# Altium PCB Underwater_ROV_Aux.PcbDoc (part 1 of 2)
Units mm, origin at the board's own origin, x right, y up, seen from the top; angles counter-clockwise.
Board outline 100 x 100 mm, 2 copper layers (Top Layer, Bottom Layer); 61 components, 140 nets, 560 pads, 86 vias.
Unrouted connection lines stored in the file: 2.
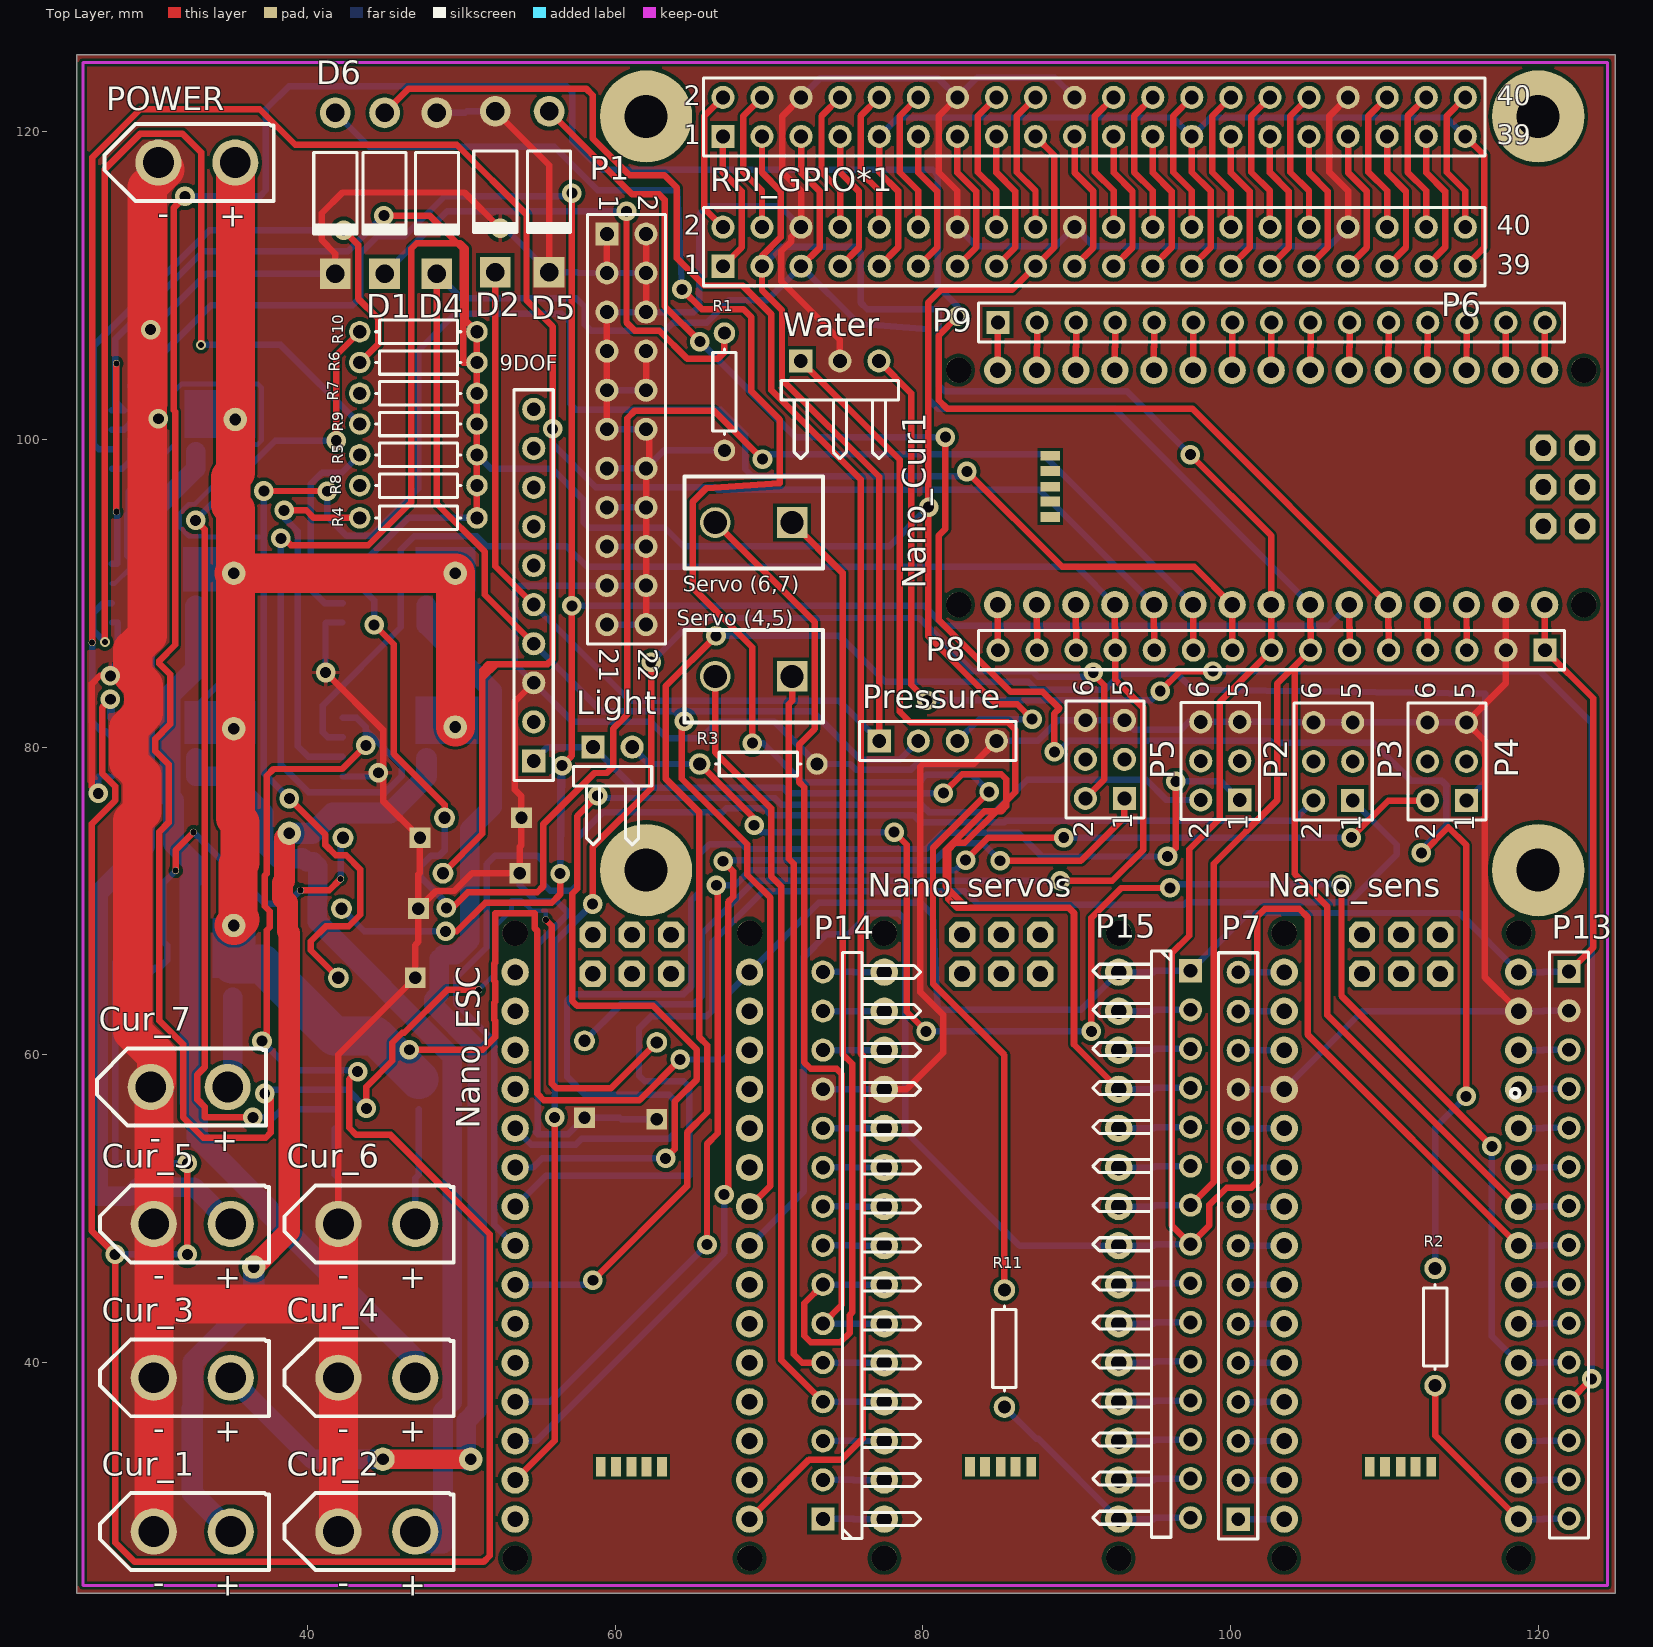
[diagram p0: Top Layer view]
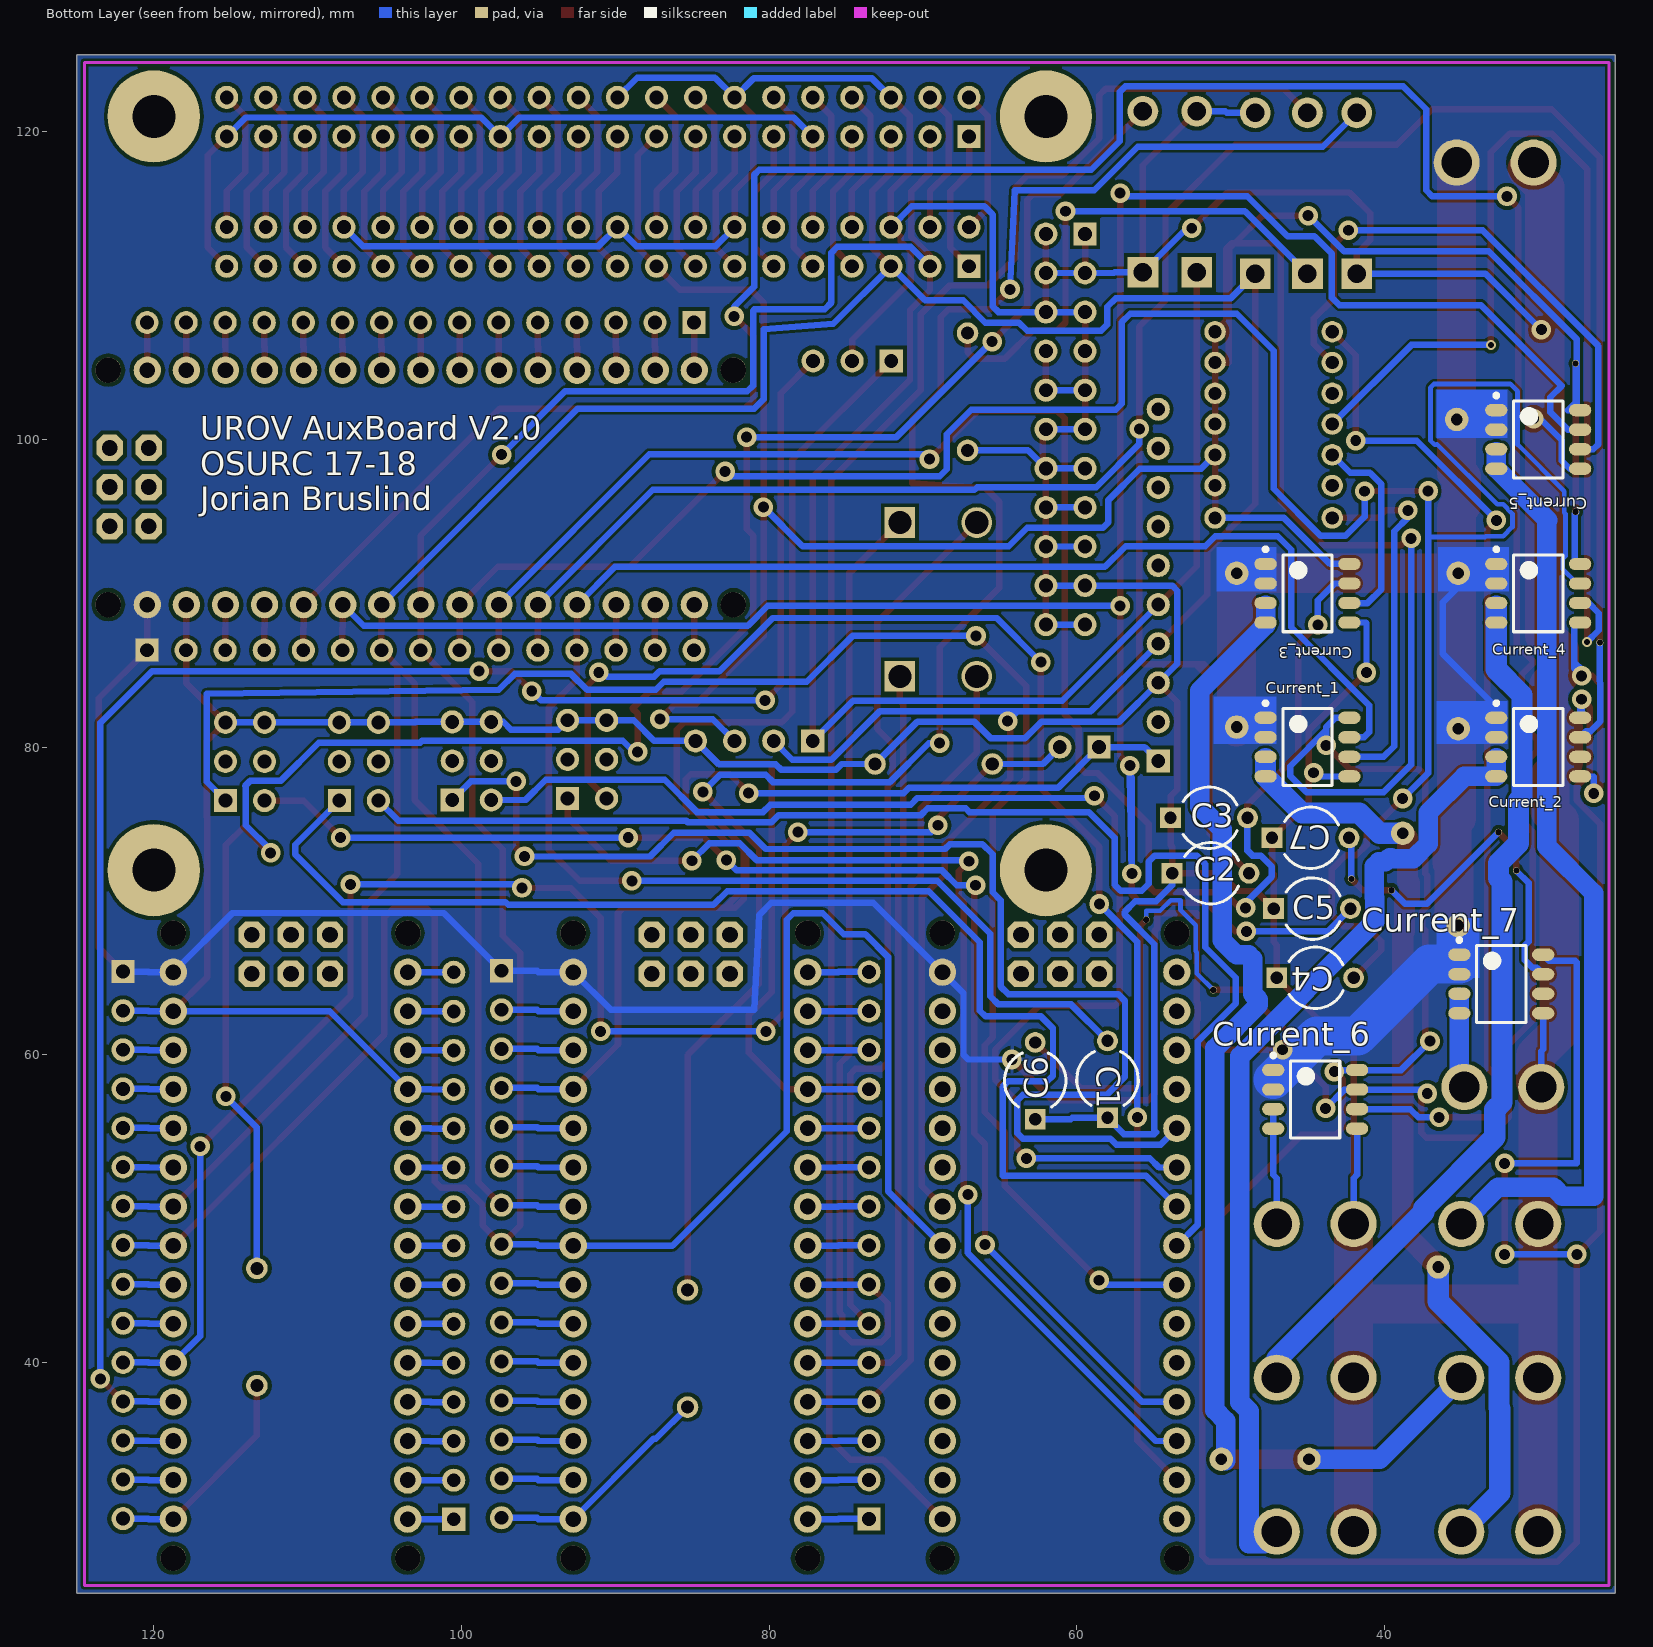
[diagram p1: Bottom Layer view, seen from below]
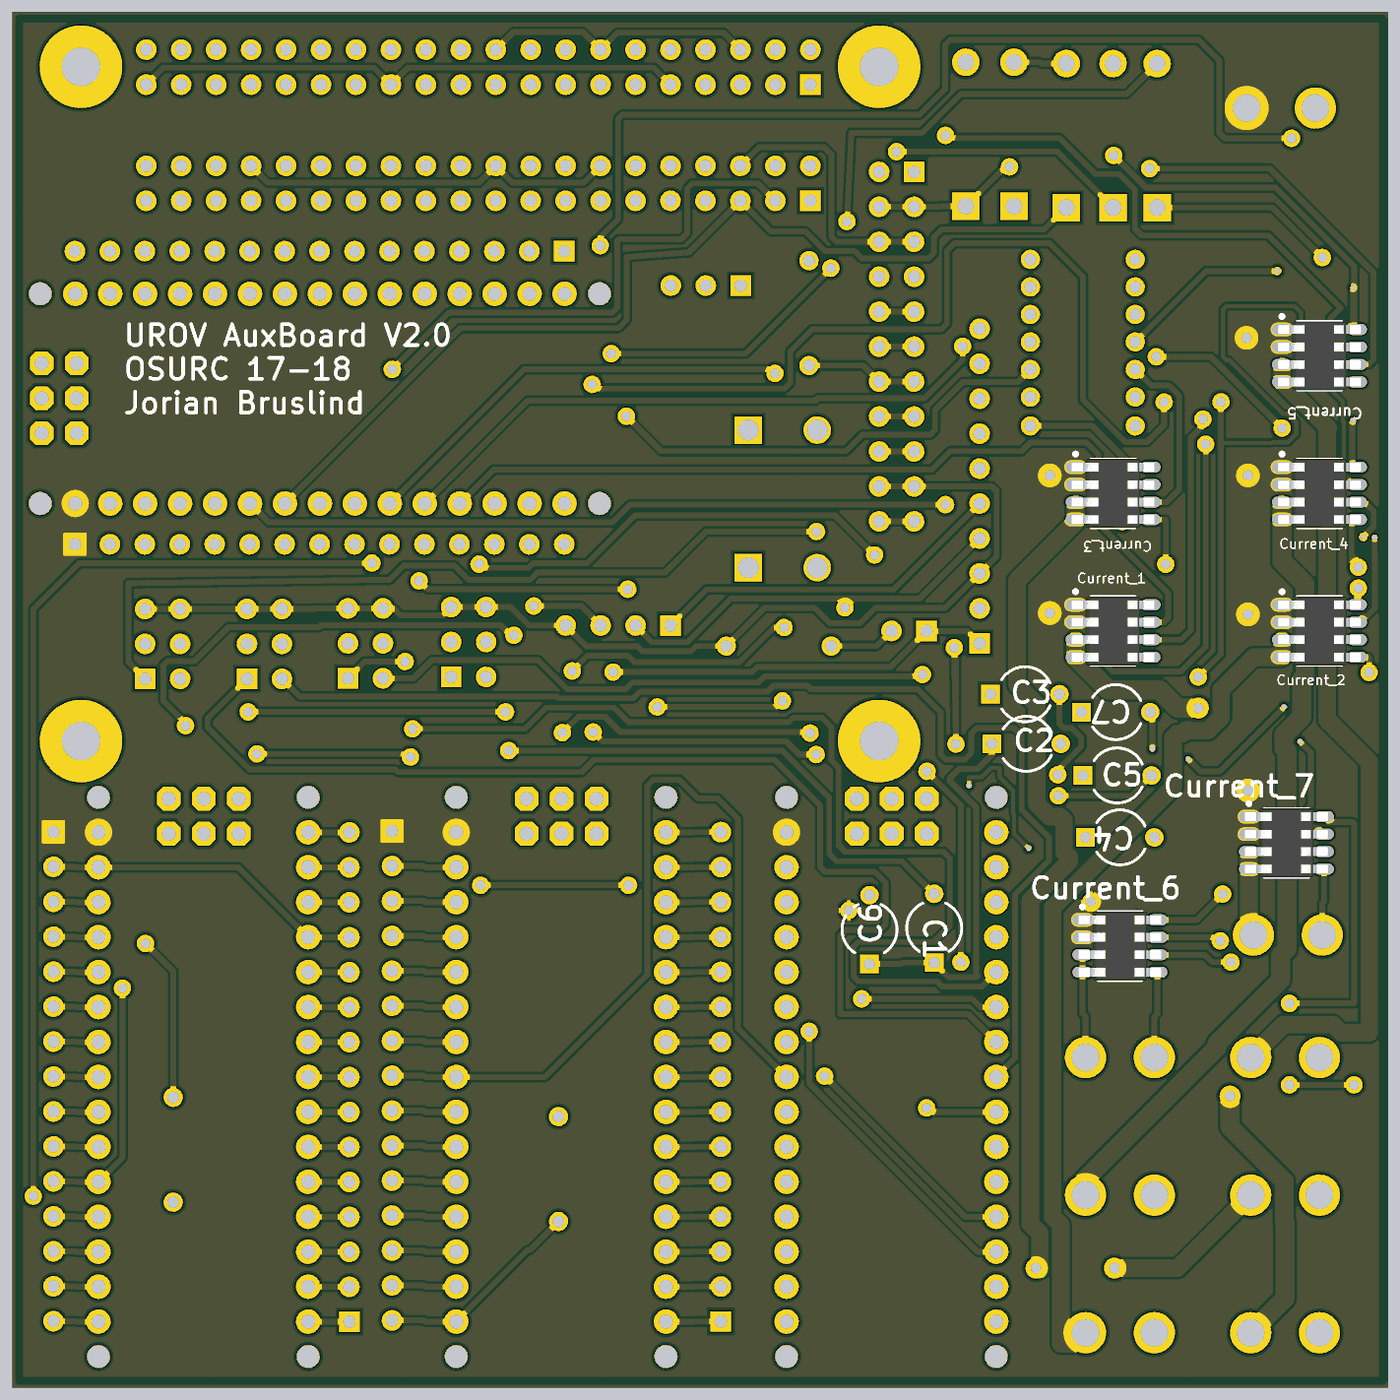
[diagram p3: 3D render of the assembled board from below, using the file's embedded part models]

## Layer stack, top to bottom
Top Solder: solder mask 0.0102, Solder Resist, Dk 3.5
Top Layer: signal copper 0.0356
Dielectric 1: dielectric 0.32, FR-4, Dk 4.8
Bottom Layer: signal copper 0.0356
Bottom Solder: solder mask 0.0102, Solder Resist, Dk 3.5

## Board outline
25,25 25,125 125,125 125,25

## Design rules (kind name [scope] priority, off if disabled: settings)
Clearance [All] p1: gap=0.178 ignorepadtopadclearanceinfootprint=FALSE except(0: Arc-Hole Track-Hole SMDPad-Hole THPad-Hole Via-Hole Fill-Hole Poly-Hole Region-Hole Text-Hole; 0.254: THPad-THPad THPad-Via THPad-Fill THPad-Poly THPad-Region THPad-Text Via-Via Via-Fill Via-Poly Via-Region Via-Text Fill-Fill Fill-Poly Fill-Region Fill-Text Poly-Poly Poly-Region Poly-Text Region-Region Region-Text Text-Text)
PolygonConnect PolygonConnect_13 [All vs IsNamedPolygon('Bot Layer - 12V')] p1: thpad.connectstyle=Direct thpad.reliefconductorwidth=0.254 thpad.reliefentries=4 thpad.polygonreliefangle="90 Angle" thpad.airgapwidth=0.254 smdpad.connectstyle=Direct smdpad.reliefconductorwidth=0.254 smdpad.reliefentries=4 smdpad.polygonreliefangle="90 Angle" smdpad.airgapwidth=0.254 via.connectstyle=Relief via.reliefconductorwidth=0.254 via.reliefentries=4 via.polygonreliefangle="90 Angle" via.airgapwidth=0.254
PolygonConnect PolygonConnect_12 [All vs IsNamedPolygon('Top Layer GND')] p2: thpad.connectstyle=Direct thpad.reliefconductorwidth=0.254 thpad.reliefentries=4 thpad.polygonreliefangle="90 Angle" thpad.airgapwidth=0.254 smdpad.connectstyle=Direct smdpad.reliefconductorwidth=0.254 smdpad.reliefentries=4 smdpad.polygonreliefangle="90 Angle" smdpad.airgapwidth=0.254 via.connectstyle=Relief via.reliefconductorwidth=0.254 via.reliefentries=4 via.polygonreliefangle="90 Angle" via.airgapwidth=0.254
PolygonConnect PolygonConnect_11 [All vs IsNamedPolygon('Top Layer-GND')] p3: thpad.connectstyle=Direct thpad.reliefconductorwidth=0.254 thpad.reliefentries=4 thpad.polygonreliefangle="90 Angle" thpad.airgapwidth=0.254 smdpad.connectstyle=Direct smdpad.reliefconductorwidth=0.254 smdpad.reliefentries=4 smdpad.polygonreliefangle="90 Angle" smdpad.airgapwidth=0.254 via.connectstyle=Relief via.reliefconductorwidth=0.254 via.reliefentries=4 via.polygonreliefangle="90 Angle" via.airgapwidth=0.254
PolygonConnect PolygonConnect_10 [All vs IsNamedPolygon('Top Layer-GND')] p4: thpad.connectstyle=Direct thpad.reliefconductorwidth=0.254 thpad.reliefentries=4 thpad.polygonreliefangle="90 Angle" thpad.airgapwidth=0.254 smdpad.connectstyle=Direct smdpad.reliefconductorwidth=0.254 smdpad.reliefentries=4 smdpad.polygonreliefangle="90 Angle" smdpad.airgapwidth=0.254 via.connectstyle=Relief via.reliefconductorwidth=0.254 via.reliefentries=4 via.polygonreliefangle="90 Angle" via.airgapwidth=0.254
PolygonConnect PolygonConnect_9 [All vs IsNamedPolygon('Bot Layer - 12V')] p5: thpad.connectstyle=Direct thpad.reliefconductorwidth=0.254 thpad.reliefentries=4 thpad.polygonreliefangle="90 Angle" thpad.airgapwidth=0.254 smdpad.connectstyle=Direct smdpad.reliefconductorwidth=0.254 smdpad.reliefentries=4 smdpad.polygonreliefangle="90 Angle" smdpad.airgapwidth=0.254 via.connectstyle=Relief via.reliefconductorwidth=0.254 via.reliefentries=4 via.polygonreliefangle="90 Angle" via.airgapwidth=0.254
PolygonConnect PolygonConnect_8 [All vs IsNamedPolygon('Bot Layer - 12V')] p6: thpad.connectstyle=Direct thpad.reliefconductorwidth=0.254 thpad.reliefentries=4 thpad.polygonreliefangle="90 Angle" thpad.airgapwidth=0.254 smdpad.connectstyle=Direct smdpad.reliefconductorwidth=0.254 smdpad.reliefentries=4 smdpad.polygonreliefangle="90 Angle" smdpad.airgapwidth=0.254 via.connectstyle=Relief via.reliefconductorwidth=0.254 via.reliefentries=4 via.polygonreliefangle="90 Angle" via.airgapwidth=0.254
PolygonConnect PolygonConnect_7 [All vs IsNamedPolygon('Top Layer-GND')] p7: thpad.connectstyle=Direct thpad.reliefconductorwidth=0.254 thpad.reliefentries=4 thpad.polygonreliefangle="90 Angle" thpad.airgapwidth=0.254 smdpad.connectstyle=Direct smdpad.reliefconductorwidth=0.254 smdpad.reliefentries=4 smdpad.polygonreliefangle="90 Angle" smdpad.airgapwidth=0.254 via.connectstyle=Relief via.reliefconductorwidth=0.254 via.reliefentries=4 via.polygonreliefangle="90 Angle" via.airgapwidth=0.254
PolygonConnect PolygonConnect_6 [All vs IsNamedPolygon('Bot layer - 12V')] p8: thpad.connectstyle=Direct thpad.reliefconductorwidth=0.254 thpad.reliefentries=4 thpad.polygonreliefangle="90 Angle" thpad.airgapwidth=0.254 smdpad.connectstyle=Direct smdpad.reliefconductorwidth=0.254 smdpad.reliefentries=4 smdpad.polygonreliefangle="90 Angle" smdpad.airgapwidth=0.254 via.connectstyle=Relief via.reliefconductorwidth=0.254 via.reliefentries=4 via.polygonreliefangle="90 Angle" via.airgapwidth=0.254
PolygonConnect PolygonConnect_5 [All vs IsNamedPolygon('Top Layer-GND')] p9: thpad.connectstyle=Direct thpad.reliefconductorwidth=0.254 thpad.reliefentries=4 thpad.polygonreliefangle="90 Angle" thpad.airgapwidth=0.254 smdpad.connectstyle=Direct smdpad.reliefconductorwidth=0.254 smdpad.reliefentries=4 smdpad.polygonreliefangle="90 Angle" smdpad.airgapwidth=0.254 via.connectstyle=Relief via.reliefconductorwidth=0.254 via.reliefentries=4 via.polygonreliefangle="90 Angle" via.airgapwidth=0.254
PolygonConnect PolygonConnect_4 [All vs IsNamedPolygon('Bot Layer - 12V')] p10: thpad.connectstyle=Direct thpad.reliefconductorwidth=0.254 thpad.reliefentries=4 thpad.polygonreliefangle="90 Angle" thpad.airgapwidth=0.254 smdpad.connectstyle=Direct smdpad.reliefconductorwidth=0.254 smdpad.reliefentries=4 smdpad.polygonreliefangle="90 Angle" smdpad.airgapwidth=0.254 via.connectstyle=Relief via.reliefconductorwidth=0.254 via.reliefentries=4 via.polygonreliefangle="90 Angle" via.airgapwidth=0.254
PolygonConnect PolygonConnect_3 [All vs IsNamedPolygon('Top Layer-GND')] p11: thpad.connectstyle=Direct thpad.reliefconductorwidth=0.254 thpad.reliefentries=4 thpad.polygonreliefangle="90 Angle" thpad.airgapwidth=0.254 smdpad.connectstyle=Direct smdpad.reliefconductorwidth=0.254 smdpad.reliefentries=4 smdpad.polygonreliefangle="90 Angle" smdpad.airgapwidth=0.254 via.connectstyle=Relief via.reliefconductorwidth=0.254 via.reliefentries=4 via.polygonreliefangle="90 Angle" via.airgapwidth=0.254
PolygonConnect PolygonConnect_2 [All vs IsNamedPolygon('Bot Layer - 12V')] p12: thpad.connectstyle=Direct thpad.reliefconductorwidth=0.254 thpad.reliefentries=4 thpad.polygonreliefangle="90 Angle" thpad.airgapwidth=0.254 smdpad.connectstyle=Direct smdpad.reliefconductorwidth=0.254 smdpad.reliefentries=4 smdpad.polygonreliefangle="90 Angle" smdpad.airgapwidth=0.254 via.connectstyle=Relief via.reliefconductorwidth=0.254 via.reliefentries=4 via.polygonreliefangle="90 Angle" via.airgapwidth=0.254
PolygonConnect PolygonConnect_1 [All vs IsNamedPolygon('Top Layer-GND')] p13: thpad.connectstyle=Direct thpad.reliefconductorwidth=0.254 thpad.reliefentries=4 thpad.polygonreliefangle="90 Angle" thpad.airgapwidth=0.254 smdpad.connectstyle=Direct smdpad.reliefconductorwidth=0.254 smdpad.reliefentries=4 smdpad.polygonreliefangle="90 Angle" smdpad.airgapwidth=0.254 via.connectstyle=Relief via.reliefconductorwidth=0.254 via.reliefentries=4 via.polygonreliefangle="90 Angle" via.airgapwidth=0.254
PolygonConnect [All] p14: connectstyle=Relief reliefconductorwidth=0.254 reliefentries=4 polygonreliefangle="90 Angle" airgapwidth=0.254
RoomDefinition Underwater_ROV_CurrentSense [InComponentClass('Underwater_ROV_CurrentSense')] p1: confinementstyle=ConfineIn formatcopy=TRUE lockcomponents=FALSE outline 25.015,24.996 125.1,24.996 125.1,128.5 25.015,128.5
RoomDefinition Underwater_ROV_Servos [InComponentClass('Underwater_ROV_Servos')] p2: confinementstyle=ConfineIn formatcopy=TRUE lockcomponents=FALSE outline 25.034,25.015 124.6,25.015 124.6,128.349 25.034,128.349
RoomDefinition Underwater_ROV_Sensors [InComponentClass('Underwater_ROV_Sensors')] p3: confinementstyle=ConfineIn formatcopy=TRUE lockcomponents=FALSE outline 24.994,24.981 124.6,24.981 124.6,129.344 24.994,129.344
RoomDefinition Underwater_ROV_RPI [InComponentClass('Underwater_ROV_RPI')] p4: confinementstyle=ConfineIn formatcopy=TRUE lockcomponents=FALSE outline 61,102 124.32,102 124.32,125.953 61,125.953
RoomDefinition Underwater_ROV_ESCS [InComponentClass('Underwater_ROV_ESCS')] p5: confinementstyle=ConfineIn formatcopy=TRUE lockcomponents=FALSE outline 24.994,24.981 124.6,24.981 124.6,125.4 24.994,125.4
RoutingLayers RoutingLayers_2 [All] p1: top layer_v5=TRUE bottom layer_v5=TRUE
RoutingLayers RoutingLayers_1 [InNet('12V')] p2: top layer_v5=FALSE bottom layer_v5=FALSE
RoutingLayers [InNet('GND')] p3: top layer_v5=FALSE bottom layer_v5=FALSE
RoutingVias [All] p1: holewidth=0.381 width=0.635 viastyle="Through Hole" minholewidth=0.33 minwidth=0.508 maxholewidth=0.711 maxwidth=1.27
SMDNeckDown [InNet('GND')] p1: percent=50.000
SolderMaskExpansion [All] p1: expansion=0.102
Width [All] p1: maxlimit=10 minlimit=0.152 preferedwidth=0.42 minimp=50.000000 maximp=50.000000 favimp=50.000000
29 further rules are at their usual default settings.

## Classes and differential pairs
component class Underwater_ROV_ESCS: D1 ESC(78) Nano_ESC P1 P2 P3 P4 P5 R1
component class Underwater_ROV_RPI: D2 D4 P6 POWER RPI_GPIO*1
component class Underwater_ROV_Sensors: 9DOF .1 C1 C2 C3 C4 C5 C6 C7 Cur_1 Cur_2 Cur_3 Cur_4 Cur_5 Cur_6 Cur_7 Current_1 Current_2 Current_3 Current_4 Current_5 Current_6 Current_7 D5 Light Nano_sens P7 P13 Pressure R2 R3 R4 R5 R6 R7 R8 R9 R10 Water
component class Underwater_ROV_Servos: D6 Nano_servos P14 P15 R11 "Servo (4,5)" "Servo (6,7)"
component class Underwater_ROV_CurrentSense: Nano_Cur1 P8 P9 P?

## Components (designator, comment, footprint, x,y, rotation, side; value= is the part's Value field where it differs from the comment)
9DOF "Header 10" HDR1X10 54.7,79.1 r90 top
C1 "Cap2" CAPR5-4X5#1 58,58.4 r90 bottom value=100pF
C2 "Cap2" CAPR5-4X5#1 51.3,71.8 r180 bottom value=100pF
C3 "Cap2" CAPR5-4X5#1 51.4,75.4 r180 bottom value=100pF
C4 "Cap2" CAPR5-4X5#2 44.5,65 r180 bottom value=100pF
C5 "Cap2" CAPR5-4X5#1 44.7,69.5 r180 bottom value=100pF
C6 "Cap2" CAPR5-4X5#1 62.7,58.3 r90 bottom value=100pF
C7 "Cap2" CAPR5-4X5#1 44.8,74.1 r180 bottom value=100pF
Cur_1 "XT30_2pin" XT30_2pin 35,29 r180 top
Cur_2 "XT30_2pin" XT30_2pin 47,29 r180 top
Cur_3 "XT30_2pin" XT30_2pin 35,39 r180 top
Cur_4 "XT30_2pin" XT30_2pin 47,39 r180 top
Cur_5 "XT30_2pin" XT30_2pin 35,49 r180 top
Cur_6 "XT30_2pin" XT30_2pin 47,49 r180 top
Cur_7 "XT30_2pin" XT30_2pin 34.8,57.9 r180 top
Current_1 "ACS711" SOIC127P600X175-8N 45,80 r180 bottom
Current_2 "ACS711" SOIC127P600X175-8N 30,80 r180 bottom
Current_3 "ACS711" SOIC127P600X175-8N 45,90 r180 bottom
Current_4 "ACS711" SOIC127P600X175-8N 30,90 r180 bottom
Current_5 "ACS711" SOIC127P600X175-8N 30,100 r180 bottom
Current_6 "ACS711" SOIC127P600X175-8N 44.5,57.1 r180 bottom
Current_7 "ACS711" SOIC127P600X175-8N 32.4,64.6 r180 bottom
D1 "Diode 1N4001" DO-41 45,116 r270 top
D2 "Diode 11DQ03" DO-204AL 52.2,116.1 r270 top
D4 "Diode 11DQ03" DO-204AL 48.4,116 r270 top
D5 "Diode 1N4001" DO-41 55.7,116.1 r270 top
D6 "Diode 1N4001" DO-41 41.8,116 r270 top
Light "Header 2H" HDR1X2H 58.56,80 r0 top
Nano_Cur1 "Device for representing an Arduino Nano board with a footprint in an EAGLE design. Created by Dave Young for Element14. More EAGLE documentation at: http://www.element14.com/community/community/knode/cadsoft_eagle" ARDUINO_NANO 81.05,87.99 r0 top
Nano_ESC "Device for representing an Arduino Nano board with a footprint in an EAGLE design. Created by Dave Young for Element14. More EAGLE documentation at: http://www.element14.com/community/community/knode/cadsoft_eagle" ARDUINO_NANO 70,26 r90 top
Nano_sens "Device for representing an Arduino Nano board with a footprint in an EAGLE design. Created by Dave Young for Element14. More EAGLE documentation at: http://www.element14.com/community/community/knode/cadsoft_eagle" ARDUINO_NANO 120,26 r90 top
Nano_servos "Device for representing an Arduino Nano board with a footprint in an EAGLE design. Created by Dave Young for Element14. More EAGLE documentation at: http://www.element14.com/community/community/knode/cadsoft_eagle" ARDUINO_NANO 94,26 r90 top
P1 "Header 11X2" HDR2X11 59.46,113.36 r270 top
P2 "Header 3X2" HDR2X3 100.6,76.56 r90 top
P3 "Header 3X2" HDR2X3 107.94,76.52 r90 top
P4 "Header 3X2" HDR2X3 115.34,76.52 r90 top
P5 "Header 3X2" HDR2X3 93.1,76.66 r90 top
P6 "Header 20X2" HDR2X20 67,111.26 r0 top
P7 "Header 15" HDR1X15 100.5,29.8 r90 top
P8 "Header 15" HDR1X15 120.44,86.3 r180 top
P9 "Header 15" HDR1X15 84.88,107.6 r0 top
P13 "Header 15" HDR1X15 122,65.4 r270 top
P14 "Header 15H" HDR1X15H 73.5,29.82 r90 top
P15 "Header 15H" HDR1X15H 97.4,65.46 r270 top
POWER "XT30_2pin" XT30_2pin 35.3,118 r180 top
Pressure "Header 4" HDR1X4 77.16,80.4 r0 top
R1 "Res1" AXIAL-0.3 67.1,103.1 r270 top value=1K
R2 "Res1" AXIAL-0.3 113.3,42.3 r270 top value=1K
R3 "Res1" AXIAL-0.3 69.3,78.9 r180 top value=1K
R4 "Res1" AXIAL-0.3 47.2,94.9 r180 top value=1K
R5 "Res1" AXIAL-0.3 47.2,99 r180 top value=1K
R6 "Res1" AXIAL-0.3 47.2,105 r180 top value=1K
R7 "Res1" AXIAL-0.3 47.2,103 r180 top value=1K
R8 "Res1" AXIAL-0.3 47.2,97 r180 top value=1K
R9 "Res1" AXIAL-0.3 47.2,101 r180 top value=1K
R10 "Res1" AXIAL-0.3 47.2,107 r180 top value=1K
R11 "Res1" AXIAL-0.3 85.3,40.9 r270 top value=1K
RPI_GPIO*1 "Raspberry_Pi_GPIO" HDR2X20 67,119.7 r0 top locked
"Servo (4,5)" "ScrewTerminal_5mm" Screw_Terminal_5mm 71.5,84.6 r180 top
"Servo (6,7)" "ScrewTerminal_5mm" Screw_Terminal_5mm 71.5,94.6 r180 top
Water "Header 3H" HDR1X3H 72.06,105.1 r0 top

## Footprints (in the part's own frame and the unit in brackets; to place one, negate y for a bottom-side part, rotate by r counter-clockwise, add the part's x,y. Pads: shape width x height; smd on the part's side, far side on the other; paste and mask are expansions set on the pad)
ARDUINO_NANO [mil]
  round 65 hole 65: 1(50,50) 1(50,650) 1(1650,50) 1(1650,650)
  round 70 hole 40: 3V3(250,50) 5V(1250,50) A0(450,50) A1(550,50) A2(650,50) A3(750,50) A4(850,50) A5(950,50) A6(1050,50) A7(1150,50) D2(1150,650) D3(1050,650) D4(950,650) D5(850,650) D6(750,650) D7(650,650) D8(550,650) D9(450,650) D10(350,650) D11(250,650) D12(150,650) D13(150,50) GND(1250,650) GND.(1450,50) REF(350,50) RST(1350,650) RST.(1350,50) RX1(1450,650) TX1(1550,650) VIN(1550,50)
  oct 67.78x67.78 hole 40: 5V.(1546,251) GND_(1546,451) MISO(1646,251) MOSI(1546,351) RESET..(1646,451) SCK(1646,351)
  rect 50x25 smd: <USB>+V(284,431) <USB>D+(284,392) <USB>D-(284,352) <USB>GND(284,274) <USB>ID(284,314)
AXIAL-0.3 [mm] "Axial Device, Thru-Hole; 2 Leads; 0.3 in Pin Spacing"
  round 1.4 hole 0.85: 1(-3.81,0) 2(3.81,0)
  silkscreen extent -2.77,-0.76 2.77,0.76
CAPR5-4X5#1 [mm] "Capacitor; 2 Leads"
  rect 1.35x1.35 hole 0.8: 1(-2.5,0)
  round 1.35 hole 0.8: 2(2.5,0)
  silkscreen extent -1.69,-2 1.82,2
CAPR5-4X5#2 [mm] "Capacitor; 2 Leads"
  rect 1.35x1.35 hole 0.8: 1(-2.5,0)
  oval 1.351x1.35 hole 0.8: 2(2.5,0)
  silkscreen extent -1.69,-2 1.82,2
DO-41 [mm] "Diode, Axial; Body 5.2 x 2.7 mm (LxDia. max), Lead Dia. 0.86 mm (max)"
  round 2 hole 1.2: 1(-5.23,0)
  rect 2x2 hole 1.2: 2(5.23,0)
  silkscreen extent -2.65,-1.4 2.75,1.4
DO-204AL [mm] "Diode, Axial; Body 5.2 x 2.7 mm (LxDia. max), Lead Dia. 0.86 mm (max)"
  round 2 hole 1.2: 1(-5.23,0)
  rect 2x2 hole 1.2: 2(5.23,0)
  silkscreen extent -2.65,-1.4 2.75,1.4
HDR1X2H [mm] "Connector; Header; 2 Position; Right Angle"
  rect 1.5x1.5 hole 0.9: 1(0,0)
  round 1.5 hole 0.9: 2(2.54,0)
  silkscreen extent -1.27,-6.35 3.81,-1.27
HDR1X3H [mm] "Connector; Header; 3 Position; Right Angle"
  rect 1.5x1.5 hole 0.9: 1(0,0)
  round 1.5 hole 0.9: 2(2.54,0) 3(5.08,0)
  silkscreen extent -1.27,-6.35 6.35,-1.27
HDR1X4 [mm] "Connector; Header; 4 Position"
  rect 1.5x1.5 hole 0.9: 1(0,0)
  round 1.5 hole 0.9: 2(2.54,0) 3(5.08,0) 4(7.62,0)
  silkscreen extent -1.27,-1.27 8.89,1.27
HDR1X10 [mm] "Connector; Header; 10 Position"
  rect 1.5x1.5 hole 0.9: 1(0,0)
  round 1.5 hole 0.9: 2(2.54,0) 3(5.08,0) 4(7.62,0) 5(10.16,0) 6(12.7,0) 7(15.24,0) 8(17.78,0) 9(20.32,0) 10(22.86,0)
  silkscreen extent -1.27,-1.27 24.13,1.27
HDR1X15 [mm] "Connector; Header; 15 Position"
  rect 1.5x1.5 hole 0.9: 1(0,0)
  round 1.5 hole 0.9: 2(2.54,0) 3(5.08,0) 4(7.62,0) 5(10.16,0) 6(12.7,0) 7(15.24,0) 8(17.78,0) 9(20.32,0) 10(22.86,0) 11(25.4,0) 12(27.94,0) 13(30.48,0) 14(33.02,0) 15(35.56,0)
  silkscreen extent -1.27,-1.27 36.83,1.27
HDR1X15H [mm] "Connector; Header; 15 Position; Right Angle"
  rect 1.5x1.5 hole 0.9: 1(0,0)
  round 1.5 hole 0.9: 2(2.54,0) 3(5.08,0) 4(7.62,0) 5(10.16,0) 6(12.7,0) 7(15.24,0) 8(17.78,0) 9(20.32,0) 10(22.86,0) 11(25.4,0) 12(27.94,0) 13(30.48,0) 14(33.02,0) 15(35.56,0)
  silkscreen extent -1.27,-6.35 36.83,-1.27
HDR2X3 [mm] "Connector; Header; 3x2 Position"
  rect 1.5x1.5 hole 0.9: 1(0,0)
  round 1.5 hole 0.9: 2(0,2.54) 3(2.54,0) 4(2.54,2.54) 5(5.08,0) 6(5.08,2.54)
  silkscreen extent -1.27,-1.27 6.35,3.81
HDR2X11 [mm] "Connector; Header; 11x2 Position"
  rect 1.5x1.5 hole 0.9: 1(0,0)
  round 1.5 hole 0.9: 2(0,2.54) 3(2.54,0) 4(2.54,2.54) 5(5.08,0) 6(5.08,2.54) 7(7.62,0) 8(7.62,2.54) 9(10.16,0) 10(10.16,2.54) 11(12.7,0) 12(12.7,2.54) 13(15.24,0) 14(15.24,2.54) 15(17.78,0) 16(17.78,2.54) 17(20.32,0) 18(20.32,2.54) 19(22.86,0) 20(22.86,2.54) 21(25.4,0) 22(25.4,2.54)
  silkscreen extent -1.27,-1.27 26.67,3.81
HDR2X20 [mm] "Connector; Header; 20x2 Position"
  rect 1.5x1.5 hole 0.9: 1(0,0)
  round 1.5 hole 0.9: 2(0,2.54) 3(2.54,0) 4(2.54,2.54) 5(5.08,0) 6(5.08,2.54) 7(7.62,0) 8(7.62,2.54) 9(10.16,0) 10(10.16,2.54) 11(12.7,0) 12(12.7,2.54) 13(15.24,0) 14(15.24,2.54) 15(17.78,0) 16(17.78,2.54) 17(20.32,0) 18(20.32,2.54) 19(22.86,0) 20(22.86,2.54) 21(25.4,0) 22(25.4,2.54) 23(27.94,0) 24(27.94,2.54) 25(30.48,0) 26(30.48,2.54) 27(33.02,0) 28(33.02,2.54) 29(35.56,0) 30(35.56,2.54) 31(38.1,0) 32(38.1,2.54) 33(40.64,0) 34(40.64,2.54) 35(43.18,0) 36(43.18,2.54) 37(45.72,0) 38(45.72,2.54) 39(48.26,0) 40(48.26,2.54)
  silkscreen extent -1.27,-1.27 49.53,3.81
Screw_Terminal_5mm [mm]
  rect 2x2 hole 1.5: 1(0,0)
  round 2 hole 1.5: 2(5,0)
  silkscreen extent -2,-3 7,3
SOIC127P600X175-8N [mm] "SOIC, 8-Leads, Body 4.90x3.90mm, Pitch 1.27mm, IPC Medium Density"
  oval 1.45x0.8 smd: 1(-2.725,1.905) 2(-2.725,0.635) 3(-2.725,-0.635) 4(-2.725,-1.905) 5(2.725,-1.905) 6(2.725,-0.635) 7(2.725,0.635) 8(2.725,1.905)
  silkscreen extent -2.85,-2.5 1.6,2.98, body extent -3,-2.5 3,2.5, height 2
XT30_2pin [mm]
  round 3 hole 2: +(0,0) -(5,0)
  silkscreen extent -2.5,-2.5 8.5,2.5

## Part data
9DOF: "Header, 10-Pin", LatestRevisionDate=17-Jul-2002, LatestRevisionNote="Re-released for DXP Platform.", Publisher="Altium Limited"
C1 C2 C3 C4 C5 C6 C7: "Capacitor", PackageDescription="Capacitor; 2 Leads", PackageReference=CAPR5-4X5, Published=23-Sep-2002, Publisher="Altium Limited"
Current_1 Current_2 Current_3 Current_4 Current_5 Current_6 Current_7: Current - Sensing=25A, Current - Supply (Max)=5.5mA, Frequency="DC ~ 100kHz", Manufacturer="Allegro MicroSystems, LLC", Manufacturer Part Number=ACS711ELCTR-25AB-T, Operating Temperature="-40°C ~ 85°C", Package / Case="8-SOIC (0.154\", 3.90mm Width)", Supplier Part Number 1=620-1371-1-ND, Voltage - Supply="3 V ~ 5.5 V", Accuracy=±4%, Category="Sensors, Transducers", ComponentLink1Description=http://www.allegromicro.com/~/media/Files/Datasheets/ACS711-Datasheet.ashx, ComponentLink1URL=http://www.allegromicro.com/~/media/Files/Datasheets/ACS711-Datasheet.ashx, For Measuring=AC/DC, Linearity=±1%, Mounting Type="Surface Mount", Output="Ratiometric, Voltage", Packaging="Cut Tape (CT)", Part Status=Active, Polarization=Bidirectional, Pricing 1="1=3.36, 5=3.116, 10=2.588, 25=2.1568, 50=1.9174, 100=1.8214, 500=1.53384, 1000=1.43798 (USD)", Response Time=4.6µs, RoHS="RoHS Compliant", Sensitivity=55mV/A, Sensor Type="Hall Effect, Open Loop", Stock 1=19632, Supplier 1=Digi-Key
D1 D5 D6: "1 Amp General Purpose Rectifier", Code_JEDEC=DO-204-AL, ComponentLink1Description="Manufacturer Link", ComponentLink1URL=http://www.fairchildsemi.com/, ComponentLink2Description=Datasheet, ComponentLink2URL=http://www.fairchildsemi.com/ds/1N%2F1N4001.pdf, DatasheetVersion=1998, LatestRevisionDate=17-Jul-2002, LatestRevisionNote="Re-released for DXP Platform.", PackageDescription="Diode, Axial; Body 5.2 x 2.7 mm (LxDia. max), Lead Dia. 0.86 mm (max)", PackageReference=DO-41, PackageVersion=Aug-1999, Published=8-Jun-2000, Publisher="Altium Limited"
D2 D4: "Schottky Rectifier", Code_JEDEC=DO-204-AL, ComponentLink1Description="Manufacturer Link", ComponentLink1URL=http://www.irf.com/, ComponentLink2Description=Datasheet, ComponentLink2URL=http://www.irf.com/product-info/datasheets/data/11dq03.pdf, DatasheetVersion=Dec-1997, LatestRevisionDate=17-Jul-2002, LatestRevisionNote="Re-released for DXP Platform.", PackageDescription="Diode, Axial; Body 5.2 x 2.7 mm (LxDia. max), Lead Dia. 0.86 mm (max)", PackageReference=DO-204AL, Published=8-Jun-2000, Publisher="Altium Limited"
Light: "Header, 2-Pin, Right Angle", LatestRevisionDate=17-Jul-2002, LatestRevisionNote="Re-released for DXP Platform.", Publisher="Altium Limited"
Nano_Cur1 Nano_ESC Nano_sens Nano_servos: library part ARDUINO_NANO
P1: "Header, 11-Pin, Dual row", LatestRevisionDate=17-Jul-2002, LatestRevisionNote="Re-released for DXP Platform.", Publisher="Altium Limited"
P2 P3 P4 P5: "Header, 3-Pin, Dual row", LatestRevisionDate=17-Jul-2002, LatestRevisionNote="Re-released for DXP Platform.", Publisher="Altium Limited"
P6: "Header, 20-Pin, Dual row", LatestRevisionDate=17-Jul-2002, LatestRevisionNote="Re-released for DXP Platform.", Publisher="Altium Limited"
P7 P8 P9 P13: "Header, 15-Pin", LatestRevisionDate=17-Jul-2002, LatestRevisionNote="Re-released for DXP Platform.", Publisher="Altium Limited"
P14 P15: "Header, 15-Pin, Right Angle", LatestRevisionDate=17-Jul-2002, LatestRevisionNote="Re-released for DXP Platform.", Publisher="Altium Limited"
Pressure: "Header, 4-Pin", LatestRevisionDate=17-Jul-2002, LatestRevisionNote="Re-released for DXP Platform.", Publisher="Altium Limited"
R1 R2 R3 R4 R5 R6 R7 R8 R9 R10 R11: "Resistor", LatestRevisionDate=17-Jul-2002, LatestRevisionNote="Re-released for DXP Platform.", PackageDescription="Axial Device, Thru-Hole; 2 Leads; 0.3 in Pin Spacing", PackageReference=AXIAL-0.3, Published=8-Jun-2000, Publisher="Altium Limited"
Water: "Header, 3-Pin, Right Angle", LatestRevisionDate=17-Jul-2002, LatestRevisionNote="Re-released for DXP Platform.", Publisher="Altium Limited"

## Free pads (board coordinates)
  round 6 hole 2.8: 5(62,72) 5(62,121) 5(120,72) 5(120,121)
  round 1.524 hole 0.762: 34(35.2,91.3) 35(35.3,101.3) 36(35.2,81.2) 37(35.2,68.4) 38(49.6,91.3) 39(49.6,81.3) 40(50.6,33.7) 41(44.9,33.7) 42(38.8,74.4) 43(36.5,46.2)
  round 0.45 hole 0.4: 45(25.993,86.789) 45(27.568,95.297) 45(27.568,104.944) 45(31.419,71.967) 45(32.577,74.467) 45(39.535,70.69) 45(42.141,71.431) 45(51.127,64.213) 45(55.476,68.78)

## Via types
v1: diameter 1.27, hole 0.711, Top Layer to Bottom Layer, 84 vias
v2: diameter 0.635, hole 0.381, Top Layer to Bottom Layer, 2 vias

## Nets (pads, with @x,y where several pads share a name; then routed paths per layer and width w, separated by ;. In a path a pad name is that pad's centre, name@x,y a point inside that pad or via, vN(x,y) a via of type N, cw(c..) or ccw(c..) an arc to the next point about the centre after c; other vN are vias at no path point)
3_3V: Current_1.8 Current_2.8 Current_3.8 Current_4.8 Current_5.8 Current_6.8 Current_7.8 P6.17 pad.45@27.568,95.297 pad.45@27.568,104.944 Pressure.3 R4.1 R5.1 R6.1 R7.1 R8.1 R9.1 R10.1 RPI_GPIO*1.17 | length 416.9
  Top Layer w0.42: v1(27.178,83.109) 26.638,82.569 26.638,78.294 27.49,77.443 27.49,76.532 25.964,75.007 25.964,48.541 v1(27.49,47.015) 27.49,28.289 28.753,27.026 51.435,27.026 51.841,27.432 51.841,48.336 45.39,54.788 43.155,54.788 42.697,55.245 42.697,58.42 43.18,58.903 v1(43.256,58.903) ; pad.45@27.568,95.297 pad.45@27.568,104.944 ; v1(32.182,47.015) v1(32.182,52.934) ; v1(37.033,60.885) 37.338,61.189 37.338,68.085 37.538,68.285 37.538,69.323 37.212,69.649 37.212,71.652 37.338,71.778 37.338,78.13 37.782,78.575 42.253,78.575 v1(43.79,80.112) ; v1(38.265,93.572) 38.463,93.572 38.913,93.122 43.948,93.122 46.736,95.91 46.736,112.395 47.092,112.751 49.733,112.751 ; v1(44.958,114.554) 47.93,114.554 49.733,112.751 ; R4.1@51.01,94.9 R8.1@51.01,97 R5.1@51.01,99 R9.1@51.01,101 R7.1@51.01,103 R6.1@51.01,105 ; v1(80.366,95.606) v1@80.34,95.631 ; v1(87.097,81.813) 86.131,82.779 84.76,82.779 80.34,87.198 v1@80.34,95.631 ; RPI_GPIO*1.17@87.32,119.7 88.544,118.476 88.544,112.484 P6.17@87.32,111.26 85.782,109.722 81.16,109.722 80.34,108.902 v1@80.34,95.631 ; 49.733,112.751 49.936,112.751 50.292,112.395 50.292,107.718 R10.1@51.01,107 R6.1@51.01,105 ; 49.733,112.751 50.089,112.395 50.107,106.997 50.114,105 R6.1@51.01,105
  Bottom Layer w0.42: Current_4.8@27.275,91.905 27.61,91.905 27.61,95.174 27.527,95.256 pad.45@27.568,95.297 ; Current_5.8@27.275,101.905 Current_5.8@27.483,101.905 ; v1(27.49,47.015) v1(32.182,47.015) ; pad.45@27.568,104.944 27.568,102.404 28.067,101.905 Current_5.8@27.483,101.905 ; Current_7.8@29.675,66.505 29.269,66.099 27.585,66.099 27.488,66.002 27.488,52.934 v1(32.182,52.934) ; v1(37.033,60.885) 38.913,59.005 Current_6.8@41.775,59.005 43.154,59.005 v1(43.256,58.903) ; v1(38.265,93.572) 38.265,78.854 40.056,77.064 45.062,77.064 46.119,78.121 46.119,78.763 43.79,81.092 ; Current_1.8@42.275,81.905 43.18,81.905 43.79,81.295 43.79,81.092 ; Current_3.8@42.275,91.905 43.531,91.905 46.526,94.9 R4.1@51.01,94.9 ; v1(43.79,80.112) 43.79,81.092 ; v1(44.958,114.554) 44.945,114.554 42.625,112.234 33.215,112.234 27.483,106.502 Current_5.8@27.483,101.905 ; R5.1@51.01,99 51.915,98.095 55.905,98.095 57.937,96.063 57.937,94.615 58.293,94.259 63.221,94.259 64.414,93.066 77.826,93.066 v1(80.366,95.606) ; Pressure.3@82.24,80.4 83.653,81.813 v1(87.097,81.813) ; Current_2.8@27.178,81.905 Current_2.8@27.275,81.905 27.275,83.012 v1(27.178,83.109) Current_2.8@27.178,81.905
12V: Current_1.1 Current_1.2 Current_2.1 Current_2.2 Current_3.1 Current_3.2 Current_4.1 Current_4.2 Current_5.1 Current_5.2 Current_6.1 Current_6.2 Current_7.1 Current_7.2 Nano_Cur1.VIN Nano_ESC.VIN Nano_sens.VIN Nano_servos.VIN P8.1 P13.1 P15.1 pad.34 pad.35 pad.36 pad.37 pad.38 pad.39 POWER.+ | length 248
  Top Layer w0.42: v1(46.609,60.325) 51.376,60.325 52.197,61.146 52.197,62.21 52.137,62.27 52.137,63.39 52.197,63.45 52.197,64.75 52.137,64.81 52.137,65.93 52.197,65.99 52.197,69.2 54.78,69.2 54.78,68.207 54.94,68.047 54.94,57.468 55.359,57.048 61.57,57.048 v1(64.211,59.69) ; Nano_Cur1.VIN@120.42,89.26 120.42,87.777 120.44,87.757 P8.1@120.44,86.3 123.571,83.169 123.571,66.971 P13.1@122,65.4
  Top Layer w2.54: pad.37@35.2,68.4 35.604,68.804 35.478,68.93 35.478,72.37 35.604,72.496 35.604,75.096 35.3,75.4 pad.34@35.3,91.3 ; pad.34@35.2,91.3 pad.34@35.3,91.3 ; POWER.+@35.3,118 pad.35@35.3,101.3 35.3,97.84 35.001,97.541 35.001,95.753 35.3,95.454 pad.34@35.3,91.3 ; pad.39@49.6,81.3 pad.38@49.6,91.3 pad.34@35.3,91.3
  Bottom Layer w0.42: Current_4.2@32.725,90.635 pad.34@34.968,90.635 ; 34.138,81.905 Current_2.1@32.725,81.905 32.725,82.585 36.195,86.055 36.195,89.408 pad.34@34.968,90.635 ; 36.195,90.318 35.877,90.635 pad.34@34.968,90.635 ; v1(46.609,60.325) 47.225,59.709 Current_6.1@47.225,59.005 47.225,58.389 Current_6.2@47.225,57.735 ; v1(64.211,59.69) 67.043,59.69 67.361,60.008 67.361,64.001 Nano_ESC.VIN@68.73,65.37 73.234,69.874 79.855,69.874 80.645,69.084 80.962,62.935 90.295,62.935 Nano_servos.VIN@92.73,65.37 94.996,65.37 95.086,65.46 P15.1@97.4,65.46 101.155,69.215 114.885,69.215 Nano_sens.VIN@118.73,65.37 120.345,65.37 120.375,65.4 P13.1@122,65.4
  Bottom Layer w2.54: 35.1,65.9 37.056,65.9 41.735,61.221 44.393,61.221 47.225,58.389
Cur_1: C1.2 Current_1.7 Nano_Cur1.A0 P8.12 | length 124.6
  Top Layer w0.42: v1(88.921,71.306) 92.308,71.306 94.336,73.334 94.336,82.543 92.5,84.379 P8.12@92.5,86.3 92.5,87.757 92.48,87.777 Nano_Cur1.A0@92.48,89.26
  Bottom Layer w0.42: Current_1.7@42.275,80.635 41.323,80.635 40.996,80.962 40.996,82.728 46.057,87.789 46.057,92.828 46.93,93.701 51.003,93.701 51.638,93.066 56.82,93.066 58.166,91.719 90.021,91.719 Nano_Cur1.A0@92.48,89.26 ; C1.2@58,60.9 60.37,63.27 65.087,63.27 65.623,63.806 65.623,67.865 69.065,71.306 v1(88.921,71.306)
Cur_2: C2.2 Current_2.7 Nano_Cur1.A1 P8.11 pad.45@25.993,86.789 | length 168.2
  Top Layer w0.42: pad.45@25.993,86.789 25.993,118.335 29.119,121.461 36.883,121.461 39.192,119.151 49.695,119.151 54.229,114.617 54.229,109.042 55.931,107.34 v1(55.931,100.686) 55.931,85.725 55.601,85.395 52.273,85.395 ; C2.2@48.8,71.8 51.359,74.359 51.359,84.48 ; Nano_Cur1.A1@95.02,89.26 95.02,87.777 95.04,87.757 P8.11@95.04,86.3 ; 51.359,84.48 52.273,85.395 ; 51.359,84.48 51.359,85.001 51.752,85.395 52.273,85.395
  Bottom Layer w0.42: pad.45@25.993,86.789 25.964,81.669 26.592,81.041 26.869,81.041 Current_2.7@27.275,80.635 ; v1(55.931,100.686) 55.931,99.708 58.737,96.901 66.472,96.901 66.65,96.723 87.557,96.723 Nano_Cur1.A1@95.02,89.26
Cur_3: C3.2 Current_3.7 Nano_Cur1.A2 P8.10 | length 112
  Top Layer w0.42: v1(44.323,87.947) 45.593,86.677 45.593,79.554 48.9,76.247 C3.2@48.9,75.4 ; v1(49.018,69.546) 49.404,69.546 50.42,70.562 54.927,70.562 55.308,70.943 55.308,74.974 58.649,78.315 59.443,78.315 59.868,78.74 59.868,81.204 60.782,82.118 60.782,101.384 61.277,101.879 66.408,101.879 v1(69.571,98.717) ; Nano_Cur1.A2@97.56,89.26 97.56,87.777 97.58,87.757 P8.10@97.58,86.3
  Bottom Layer w0.42: Current_3.7@42.275,90.635 43.223,90.635 44.323,89.535 v1(44.323,87.947) ; C3.2@48.9,75.4 48.9,73.271 48.578,72.949 48.031,72.949 47.307,72.225 47.307,71.59 49.352,69.546 v1(49.018,69.546) ; v1(69.571,98.717) 69.882,99.029 87.791,99.029 Nano_Cur1.A2@97.56,89.26
Cur_4: C4.2 Current_4.7 Nano_Cur1.A3 P8.9 | length 168.1
  Top Layer w0.42: v1(37.16,96.647) 41.707,96.647 41.655,96.596 41.619,96.632 v1(41.291,96.632) ; v1(38.811,76.657) 41.161,74.307 41.161,73.628 41.828,72.961 42.507,72.961 43.42,72.048 43.42,69.109 42.672,68.361 41.188,68.361 40.208,67.381 40.208,66.792 C4.2@42,65 ; v1(82.855,97.917) 89.052,91.719 97.641,91.719 Nano_Cur1.A3@100.1,89.26 100.1,87.777 100.12,87.757 P8.9@100.12,86.3
  Bottom Layer w0.305: Current_4.7@27.275,90.635 27.47,90.635 28.406,91.571 28.406,92.239 28.226,92.419 28.226,95.15 28.307,95.231 28.307,96.635 31.344,99.672 31.344,103.118 31.832,103.606 36.768,103.606 37.006,103.368 37.006,99.932 36.735,99.66 36.613,99.66 36.579,99.694 32.669,95.783 32.284,95.783 31.674,95.173 31.674,94.311 32.284,93.701 33.419,93.701 33.459,93.661 37.109,93.661 37.16,93.61
  Bottom Layer w0.42: v1(37.16,96.647) 37.16,78.308 v1(38.811,76.657) ; v1(41.291,96.632) 41.291,94.98 42.545,93.726 44.133,93.726 47.193,96.787 47.193,105.766 49.606,108.179 56.528,108.179 57.074,107.632 57.074,102.324 57.468,101.93 66.853,101.93 68.453,100.33 68.453,98.057 68.897,97.612 82.55,97.612 v1(82.855,97.917)
Cur_5: C5.2 Current_5.7 Nano_Cur1.A6 P8.6 | length 162.8
  Top Layer w0.42: v1(48.971,68.021) 49.695,68.021 51.562,69.888 55.88,69.888 56.413,70.421 v1(56.413,71.78) ; v1(56.54,78.791) 57.175,79.426 v1(57.175,89.179) v1(57.175,116.014) ; Nano_Cur1.A6@107.72,89.26 107.72,87.777 107.74,87.757 P8.6@107.74,86.3
  Bottom Layer w0.42: Current_5.7@27.275,100.635 28.067,100.635 29.203,101.771 29.203,101.801 29.21,101.808 29.21,102.743 28.473,103.48 33.731,108.737 42.926,108.737 43.409,109.22 43.409,112.065 44.548,113.204 46.293,113.204 48.908,115.819 57.15,115.819 57.175,115.844 v1(57.175,116.014) ; C5.2@42.2,69.5 43.679,68.021 v1(48.971,68.021) ; v1(56.54,78.791) 56.54,78.13 ; v1(57.175,89.179) 80.081,89.179 81.377,87.884 106.344,87.884 Nano_Cur1.A6@107.72,89.26 ; 56.54,78.13 56.413,78.003 v1(56.413,71.78) 56.54,78.13
Cur_6: C6.2 Current_6.7 Nano_Cur1.A7 P8.5 pad.45@51.127,64.213 pad.45@55.476,68.78 | length 232.3
  Top Layer w0.42: v1(32.029,115.799) 31.306,115.076 31.306,101.896 31.401,101.801 31.401,86.644 30.367,85.61 30.367,85.425 31.071,84.721 31.071,81.496 30.106,80.531 30.106,79.731 30.958,78.879 30.958,75.096 30.367,74.505 30.367,62.216 31.902,60.681 31.902,55.931 33.223,54.61 37.274,54.61 37.592,54.927 37.592,57.099 v1(37.211,57.48) ; v1(43.815,56.515) 43.815,57.907 45.51,59.602 45.51,60.78 46.154,61.424 46.279,61.424 49.068,64.213 pad.45@51.127,64.213 ; pad.45@55.476,68.78 55.88,68.376 55.88,58.128 56.197,57.81 59.71,57.81 C6.2@62.7,60.8 ; v1(82.271,108.001) 81.026,106.756 81.026,102.552 81.572,102.006 97.514,102.006 Nano_Cur1.A7@110.26,89.26 110.26,87.777 110.28,87.757 P8.5@110.28,86.3
  Bottom Layer w0.305: pad.45@51.127,64.213 52.195,65.281 52.195,66.663 52.258,66.727 52.258,68.42 53.259,69.421 53.259,70.049 53.898,70.049 54.588,69.359 55.464,69.359 55.476,69.347 pad.45@55.476,68.78
  Bottom Layer w0.42: v1(32.029,115.799) 36.881,115.799 37.287,116.205 37.287,121.463 38.786,122.961 56.832,122.961 57.201,122.593 57.201,119.38 59.055,117.526 80.645,117.526 80.975,117.196 80.975,109.931 82.271,108.636 v1(82.271,108.001) ; v1(37.211,57.48) 37.466,57.735 Current_6.7@41.775,57.735 42.595,57.735 v1(43.815,56.515)
Cur_7: C7.2 Current_7.7 pad.45@31.419,71.967 pad.45@32.577,74.467 pad.45@39.535,70.69 pad.45@42.141,71.431 | length 25.7
  Top Layer w0.42: pad.45@31.419,71.967 31.419,73.309 pad.45@32.577,74.467 ; pad.45@39.535,70.69 41.4,70.69 pad.45@42.141,71.431
  Bottom Layer w0.42: Current_7.7@29.675,65.235 30.081,65.641 30.358,65.641 30.864,66.147 30.864,67.109 30.618,67.355 30.618,71.166 pad.45@31.419,71.967 ; pad.45@32.577,74.467 37.239,69.805 38.65,69.805 pad.45@39.535,70.69 ; pad.45@42.141,71.431 42.141,73.941 C7.2@42.3,74.1